# Altium PCB Optogentics_Controller.PcbDoc
Units mm, origin at the board's own origin, x right, y up, seen from the top; angles counter-clockwise.
Board outline 109.09 x 58.55 mm, 4 copper layers (Top Layer, Internal Plane 1, Signal Layer 1, Bottom Layer), stack 0.778 mm thick; 87 components, 64 nets, 287 pads, 52 vias.
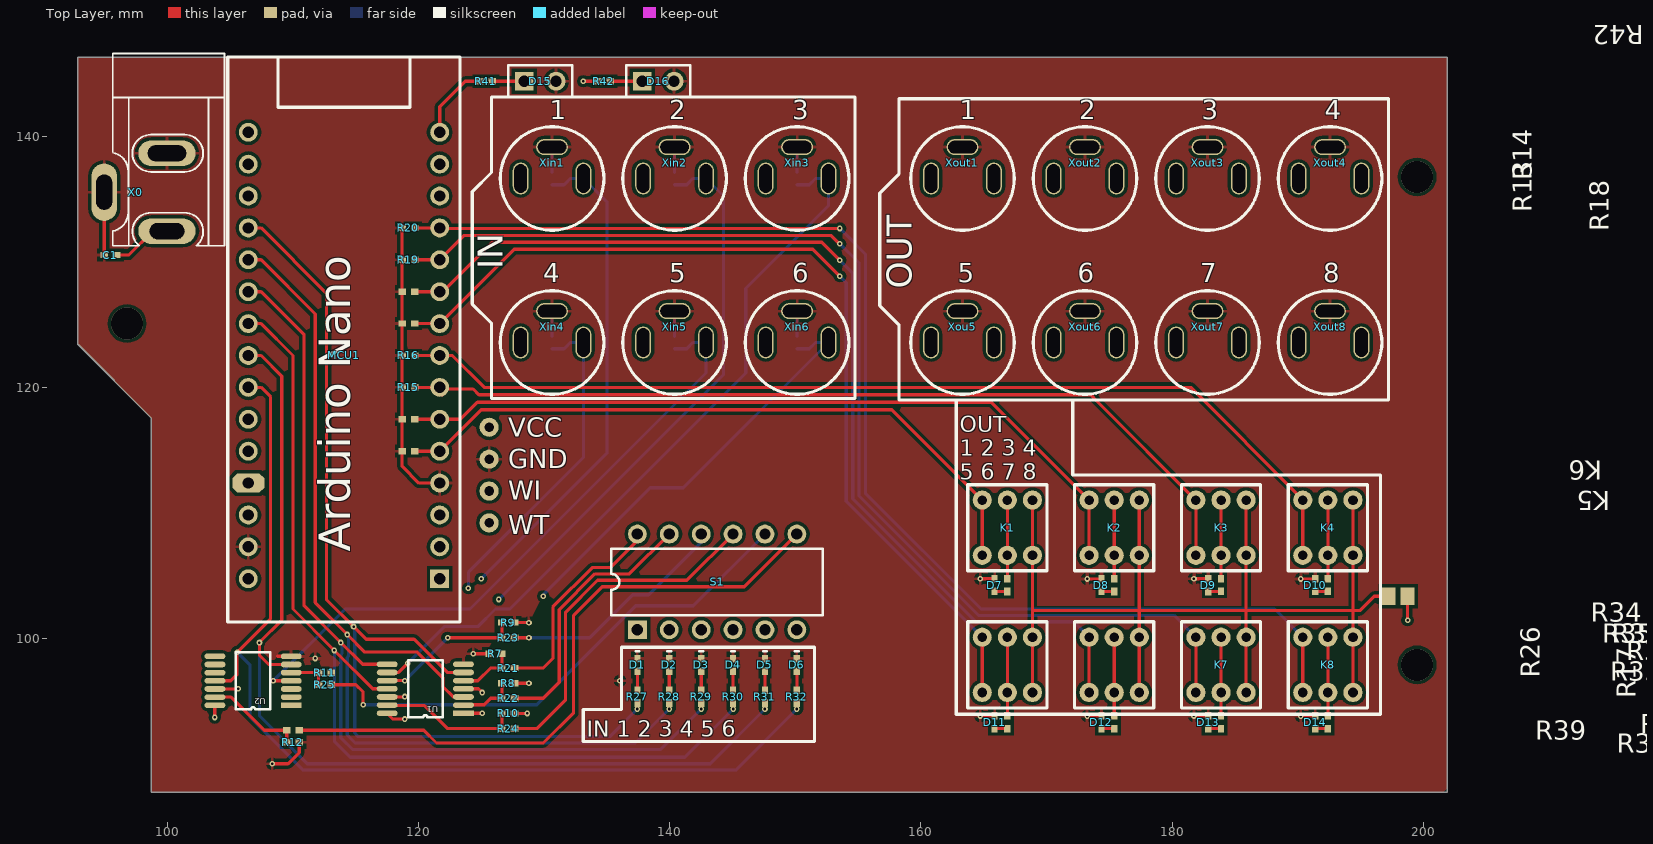
[diagram p0: Top Layer view]
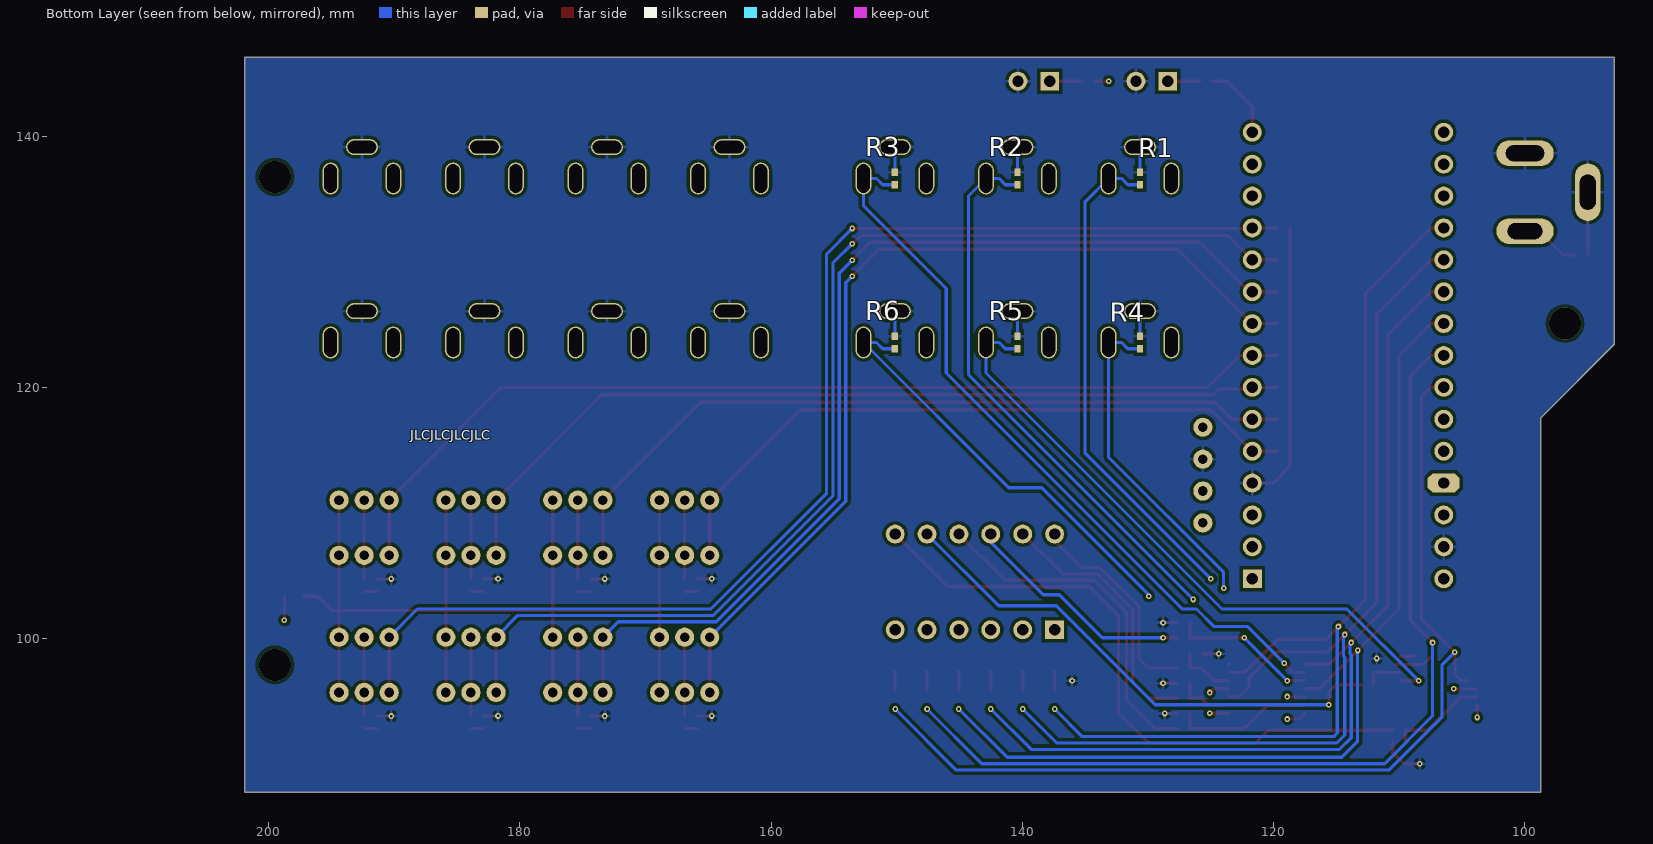
[diagram p1: Bottom Layer view, seen from below]
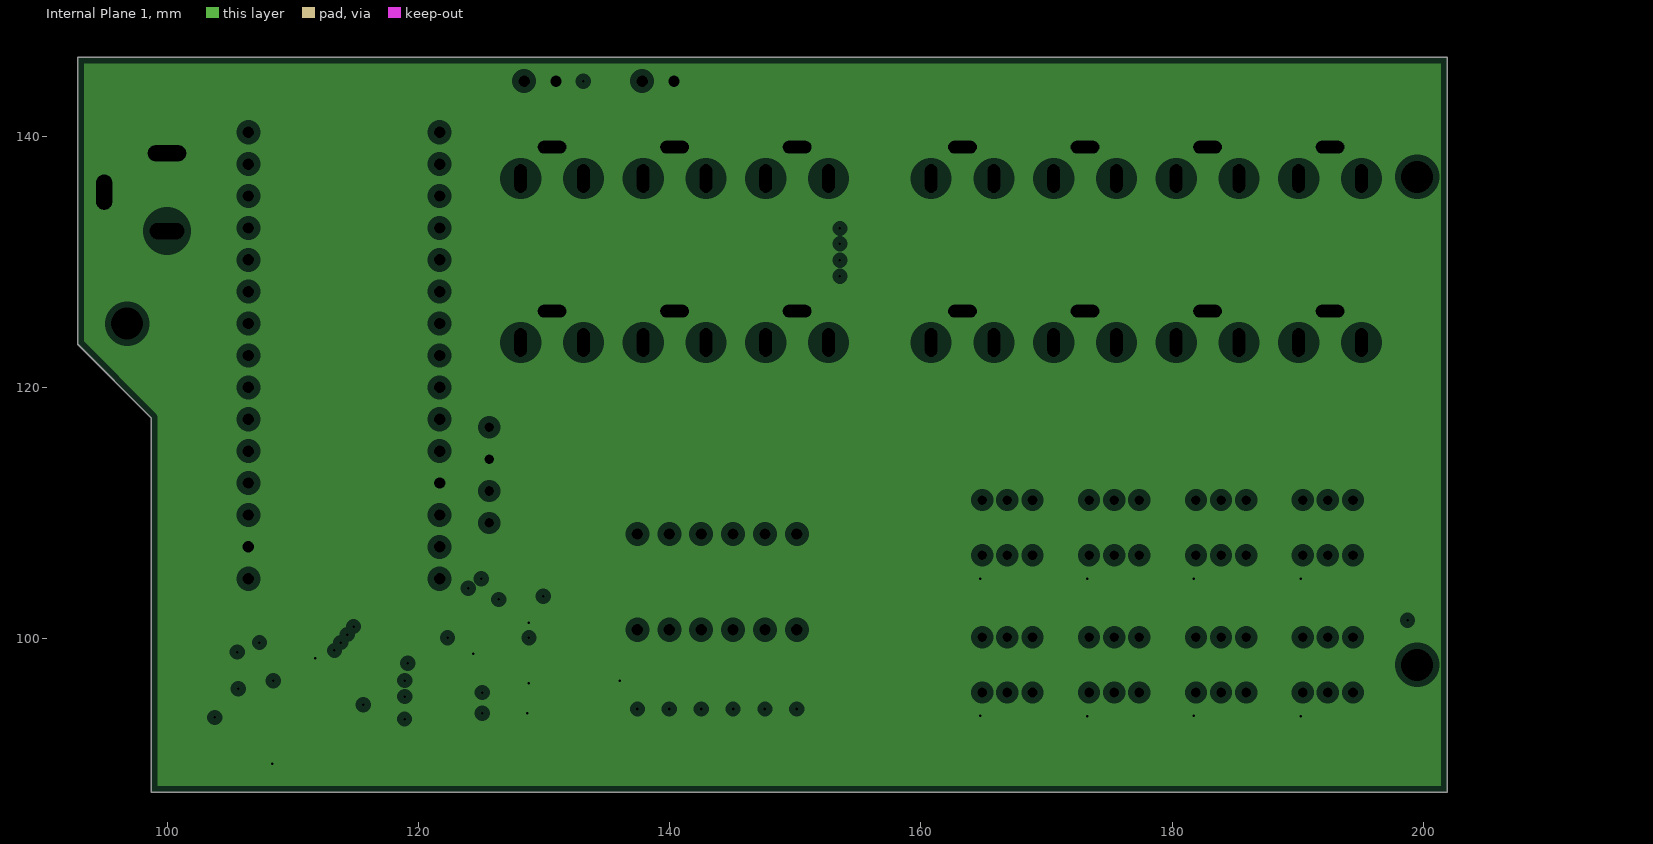
[diagram p2: Internal Plane 1, clearances drawn from the general rule]
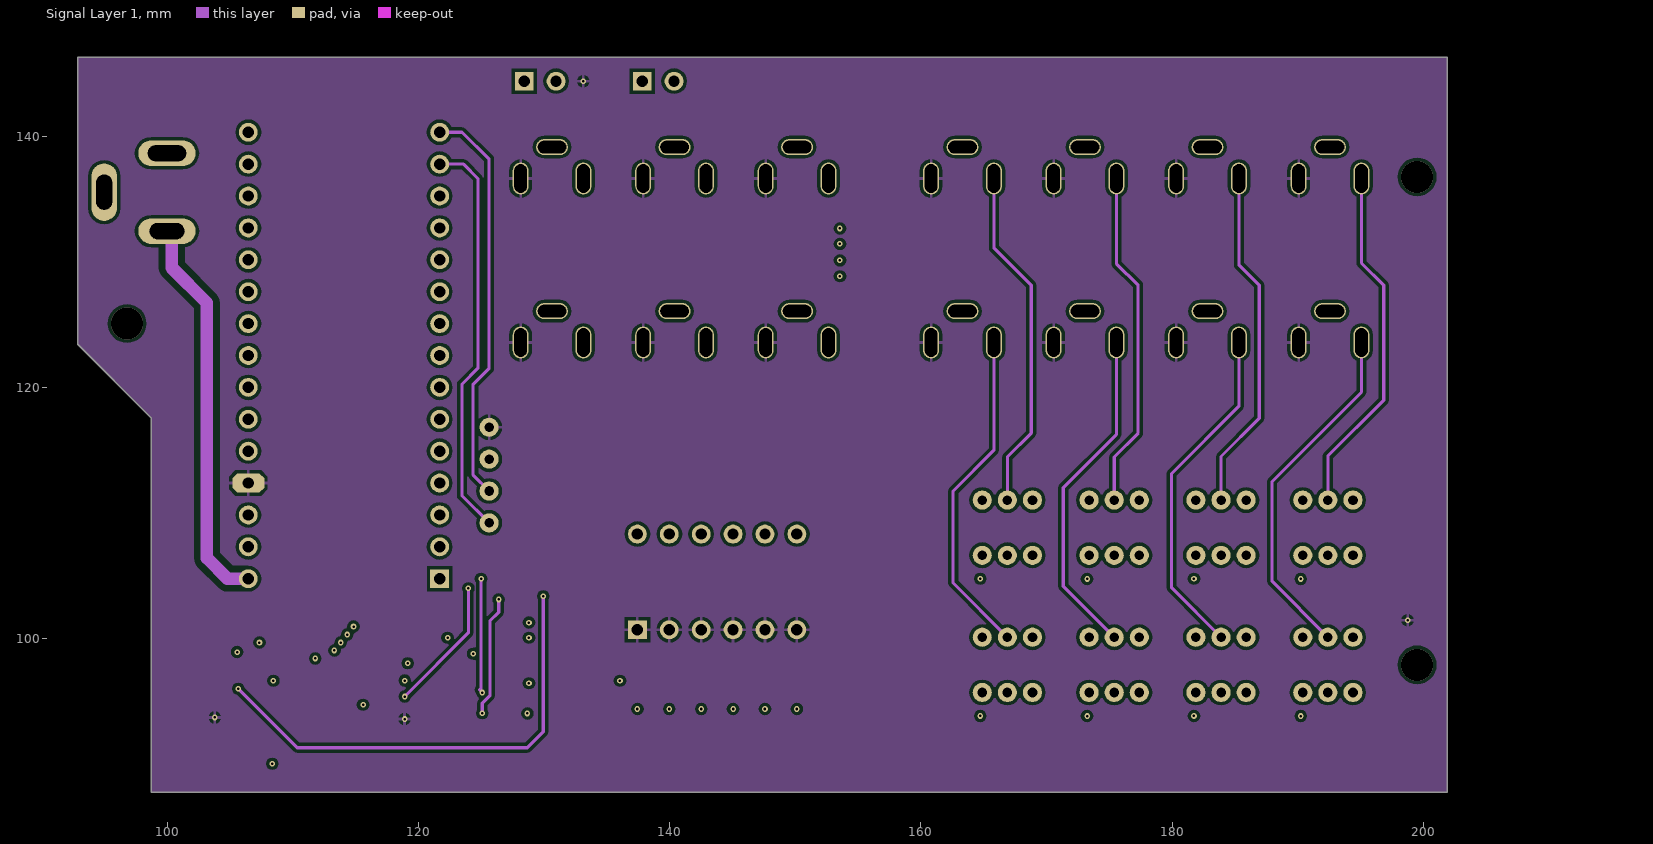
[diagram p3: Signal Layer 1]

## Layer stack, top to bottom
Top Solder: solder mask 0.0102, Solder Resist, Dk 3.5
Top Layer: signal copper 0.0356
Dielectric 1: core 0.254, FR-4, Dk 4.2
Internal Plane 1: plane copper 0.036, net GND
Dielectric 3: prepreg 0.127, Dk 4.2
Signal Layer 1: signal copper 0.036
Dielectric 2: core 0.254, Dk 4.2
Bottom Layer: signal copper 0.0356
Bottom Solder: solder mask 0.0102, Solder Resist, Dk 3.5

## Board outline
98.679,117.602 92.837,123.444 92.837,146.304 201.93,146.304 201.93,87.757 98.679,87.757

## Design rules (kind name [scope] priority, off if disabled: settings)
Clearance Clearance_1 [All] p1: gap=0.254 ignorepadtopadclearanceinfootprint=FALSE except(0: Arc-Hole Track-Hole SMDPad-Hole THPad-Hole Via-Hole Fill-Hole Poly-Hole Region-Hole Text-Hole; 0.064: SMDPad-SMDPad)
PlaneClearance [All] p1: clearance=0.508
PlaneConnect [All] p1: planeconnectstyle=Relief reliefexpansion=0.508 reliefentries=4 reliefconductorwidth=0.254 reliefairgap=0.254
PolygonConnect [All] p1: connectstyle=Relief reliefconductorwidth=0.254 reliefentries=4 polygonreliefangle="90 Angle" airgapwidth=0.254
RoutingVias [All] p1: holewidth=0.711 width=1.27 viastyle="Through Hole" minholewidth=0.711 minwidth=1.27 maxholewidth=0.711 maxwidth=1.27
SolderMaskExpansion [All] p1: expansion=0.102
Width [All] p1: maxlimit=1.5 minlimit=0.254 preferedwidth=0.254 toplayer_maxwidth=1.173 bottomlayer_maxwidth=1.173 minimp=50.000000 maximp=50.000000 favimp=50.000000
28 further rules are at their usual default settings.

## Components (designator, comment, footprint, x,y, rotation, side; value= is the part's Value field where it differs from the comment)
C1 "Cap Semi" 0402 95.449,130.556 r180 top value=2.2uF
D1 "LED2" 0402-A 137.414,97.917 r270 top
D2 "LED2" 0402-A 139.954,97.917 r270 top
D3 "LED2" 0402-A 142.494,97.917 r270 top
D4 "LED2" 0402-A 145.034,97.917 r270 top
D5 "LED2" 0402-A 147.574,97.917 r270 top
D6 "LED2" 0402-A 150.114,97.917 r270 top
D7 "LED2" 0402-A 165.862,104.267 r270 top
D8 "LED2" 0402-A 174.371,104.267 r270 top
D9 "LED2" 0402-A 182.88,104.259 r270 top
D10 "LED2" 0402-A 191.389,104.267 r270 top
D11 "LED2" 0402-A 165.862,93.345 r270 top
D12 "LED2" 0402-A 174.371,93.345 r270 top
D13 "LED2" 0402-A 182.88,93.345 r270 top
D14 "LED2" 0402-A 191.389,93.345 r270 top
D15 "LED2" HDR1X2 128.397,144.399 r0 top
D16 "LED2" HDR1X2 137.795,144.399 r0 top
K1 "SW_PB" SW_PB#1 166.878,108.839 r90 top
K2 "SW_PB" SW_PB#2 175.387,108.839 r90 top
K3 "SW_PB" SW_PB#2 183.896,108.839 r90 top
K4 "SW_PB" SW_PB#3 192.405,108.839 r90 top
K5 "SW_PB" SW_PB#2 166.878,97.917 r90 top
K6 "SW_PB" SW_PB#2 175.387,97.917 r90 top
K7 "SW_PB" SW_PB#2 183.896,97.917 r90 top
K8 "SW_PB" SW_PB#2 192.405,97.917 r90 top
MCU1 "Arduino Nano" "Arduino Nano" 114.046,122.555 r180 top
R1 "Res3" 0402 130.618,136.652 r90 bottom value=10K
R2 "Res3" 0402 140.376,136.652 r90 bottom value=10K
R3 "Res3" 0402 150.134,136.652 r90 bottom value=10K
R4 "Res3" 0402 130.618,123.587 r90 bottom value=10K
R5 "Res3" 0402 140.376,123.587 r90 bottom value=10K
R6 "Res3" 0402 150.134,123.587 r90 bottom value=10K
R7 "Res3" 0402 126.111,98.806 r180 top value=10K
R8 "Res3" 0402 127.127,96.456 r0 top value=10K
R9 "Res3" 0402 127.127,101.282 r0 top value=10K
R10 "Res3" 0402 127.127,94.043 r0 top value=10K
R11 "Res3" 0402 112.522,97.282 r0 top value=10K
R12 "Res3" 0402 109.982,91.758 r0 top value=10K
R13 "Res3" 0402 119.177,114.935 r180 top value=10K
R14 "Res3" 0402 119.169,117.475 r180 top value=10K
R15 "Res3" 0402 119.169,120.015 r180 top value=10K
R16 "Res3" 0402 119.177,122.555 r180 top value=10K
R17 "Res3" 0402 119.169,125.095 r180 top value=10K
R18 "Res3" 0402 119.169,127.635 r180 top value=10K
R19 "Res3" 0402 119.169,130.175 r180 top value=10K
R20 "Res3" 0402 119.169,132.715 r180 top value=10K
R21 "Res3" 0402 127.127,97.663 r180 top value=2K
R22 "Res3" 0402 127.127,95.25 r180 top value=2K
R23 "Res3" 0402 127.127,100.076 r180 top value=2K
R24 "Res3" 0402 127.127,92.837 r180 top value=2K
R25 "Res3" 0402 112.522,96.33 r180 top value=2K
R26 "Res3" 0402 109.982,92.71 r180 top value=2K
R27 "Res3" 0402 137.414,95.377 r90 top value=820
R28 "Res3" 0402 139.954,95.377 r90 top value=820
R29 "Res3" 0402 142.494,95.377 r90 top value=820
R30 "Res3" 0402 145.034,95.377 r90 top value=820
R31 "Res3" 0402 147.574,95.377 r90 top value=820
R32 "Res3" 0402 150.114,95.377 r90 top value=820
R33 "Res3" 0402 166.878,104.259 r270 top value=820
R34 "Res3" 0402 175.387,104.259 r270 top value=820
R35 "Res3" 0402 183.896,104.267 r270 top value=820
R36 "Res3" 0402 192.405,104.267 r270 top value=820
R37 "Res3" 0402 166.878,93.345 r270 top value=820
R38 "Res3" 0402 175.387,93.345 r270 top value=820
R39 "Res3" 0402 183.896,93.345 r270 top value=820
R40 "Res3" 0402 192.405,93.345 r270 top value=820
R41 "Res3" 0402 125.349,144.399 r0 top value=820
R42 "Res3" 0402 134.747,144.399 r0 top value=820
R42 "Res3" C0805 197.993,103.378 r180 top value=10 (schematic designator R27)
S1 "SW DIP-6" DIP-12/SW 143.764,104.521 r0 top (schematic designator S?)
U1 "Component_1" MM74HC86 120.523,96.012 r180 top
U2 "Component_1" MM74HC86 106.807,96.647 r180 top
X0 "Source" PWR 99.949,138.661 r90 top
Xin1 "RJ-392" Connectors 130.618,136.652 r0 top
Xin2 "RJ-392" Connectors 140.376,136.652 r0 top
Xin3 "RJ-392" Connectors 150.134,136.652 r0 top
Xin4 "RJ-392" Connectors 130.618,123.587 r0 top
Xin5 "RJ-392" Connectors 140.376,123.587 r0 top
Xin6 "RJ-392" Connectors 150.134,123.587 r0 top
Xou5 "RJ-392" Connectors 163.305,123.587 r0 top
Xout1 "RJ-392" Connectors 163.305,136.652 r0 top
Xout2 "RJ-392" Connectors 173.063,136.652 r0 top
Xout3 "RJ-392" Connectors 182.821,136.652 r0 top
Xout4 "RJ-392" Connectors 192.579,136.652 r0 top
Xout6 "RJ-392" Connectors 173.063,123.587 r0 top
Xout7 "RJ-392" Connectors 182.821,123.587 r0 top
Xout8 "RJ-392" Connectors 192.579,123.587 r0 top

## Footprints (in the part's own frame and the unit in brackets; to place one, negate y for a bottom-side part, rotate by r counter-clockwise, add the part's x,y. Pads: shape width x height; smd on the part's side, far side on the other; paste and mask are expansions set on the pad)
0402 [mm] "Chip Capacitor, Body 1.0x0.5mm, IPC High Density"
  rect 0.6x0.5 smd: 1(-0.5,0) 2(0.5,0)
  body extent -0.55,-0.3 0.55,0.3, height 1.3
0402-A [mm] "Chip Inductor, Body 1.0x0.5mm, IPC High Density"
  rect 0.6x0.5 smd: 1(-0.5,0) 2(0.5,0)
  silkscreen extent -1.1,-0.15 -1.1,0.15, body extent -0.55,-0.3 0.55,0.3, height 0.55
"Arduino Nano" [mm]
  rect 1.5x1.5 hole 0.9: 1(-7.62,17.78)
  round 1.5 hole 0.9: 2(-7.62,15.24) 3(-7.62,12.7) 4(-7.62,10.16) 5(-7.62,7.62) 6(-7.62,5.08) 7(-7.62,2.54) 8(-7.62,0) 9(-7.62,-2.54) 10(-7.62,-5.08) 11(-7.62,-7.62) 12(-7.62,-10.16) 13(-7.62,-12.7) 14(-7.62,-15.24) 15(-7.62,-17.78) 16(7.62,-17.78) 17(7.62,-15.24) 18(7.62,-12.7) 19(7.62,-10.16) 20(7.62,-7.62) 21(7.62,-5.08) 22(7.62,-2.54) 23(7.62,0) 24(7.62,2.54) 25(7.62,5.08) 26(7.62,7.62) 28(7.62,12.7) 29(7.62,15.24) 30(7.62,17.78)
  oct 2.54x1.5 hole 0.9 mask+0.102: 27(7.62,10.16)
  silkscreen extent -9.25,-23.77 9.25,21.23
C0805 [mm] "Chip Capacitor, Body 2.0x1.3mm, IPC High Density"
  rect 1.1x1.4 smd: 1(-0.75,0) 2(0.75,0)
  body extent -1.1,-0.72 1.1,0.72, height 1.4
Connectors [mm]
  oval 2.54x1.27 hole 1 slot 2.27 at 0 deg: 1(0,2.5)
  oval 1.27x2.54 hole 1 slot 2.27 at 90 deg: 2(-2.5,0) 3(2.5,0)
  silkscreen extent -4.13,-4.12 4.13,4.12
DIP-12/SW [mm] "DIP Switch; 12 Leads"
  rect 1.5x1.5 hole 0.9: 1(-6.35,-3.81)
  round 1.5 hole 0.9: 2(-3.81,-3.81) 3(-1.27,-3.81) 4(1.27,-3.81) 5(3.81,-3.81) 6(6.35,-3.81) 7(6.35,3.81) 8(3.81,3.81) 9(1.27,3.81) 10(-1.27,3.81) 11(-3.81,3.81) 12(-6.35,3.81)
  silkscreen extent -8.43,-2.65 8.41,2.65
HDR1X2 [mm] "Connector; Header; 2 Position"
  rect 1.5x1.5 hole 0.9: 1(0,0)
  round 1.5 hole 0.9: 2(2.54,0)
  silkscreen extent -1.27,-1.27 3.81,1.27
MM74HC86 [mm]
  rect 1.66x0.45 smd mask+0.05: 1(-3.037,1.95)
  oval 1.66x0.45 smd mask+0.05: 2(-3.037,1.3) 3(-3.037,0.65) 4(-3.037,0) 5(-3.037,-0.65) 6(-3.037,-1.3) 7(-3.037,-1.95) 8(3.037,-1.95) 9(3.037,-1.3) 10(3.037,-0.65) 11(3.037,0) 12(3.037,0.65) 13(3.037,1.3) 14(3.037,1.95)
  silkscreen extent -1.37,-2.28 1.37,2.28
PWR [mil]
  oval 80x180 hole 50 slot 110 at 90 deg: 1(-244.09,0)
  oval 80x180 hole 50 slot 120 at 90 deg: 2(0,0)
  oval 180x80 hole 50 slot 110 at 0 deg: 3(-122.05,196.85)
  Top Layer lines w12: 3.8,-7.5 1.3,-10
  silkscreen extent -290,-180 313,170
SW_PB#1 [mil]
  round 60 hole 30: 1(-86.61,-78.74) 1(86.61,-78.74) 2(-86.61,0) 2(86.61,0) 3(-86.61,78.74) 3(86.61,78.74)
  Top Layer lines w10: -86.61,78.74 86.61,78.74 ; -86.61,0 -80,0 86.61,0 ; -86.61,-78.74 86.61,-78.74
  silkscreen extent -135,-124 135,124
SW_PB#2 [mil]
  round 60 hole 30: 1(-86.61,-78.74) 1(86.61,-78.74) 2(-86.61,0) 2(86.61,0) 3(-86.61,78.74) 3(86.61,78.74)
  Top Layer lines w10: -86.61,78.74 86.61,78.74 ; -86.61,0 86.61,0 ; -86.61,-78.74 86.61,-78.74
  silkscreen extent -135,-124 135,124
SW_PB#3 [mil]
  round 60 hole 30: 1(-86.61,-78.74) 1(86.61,-78.74) 2(-86.61,0) 2(86.61,0) 3(-86.61,78.74) 3(86.61,78.74)
  Top Layer lines w10: -86.61,78.74 75,78.74 86.61,78.74 ; -86.61,0 86.61,0 ; -86.61,-78.74 86.61,-78.74
  silkscreen extent -135,-124 135,124

## Part data
C1: "Capacitor (Semiconductor SIM Model)", LatestRevisionDate=29-May-2009, LatestRevisionNote="IPC-7351 Footprint Added.", PackageDescription="Chip Capacitor", PackageReference=C1206, Published=8-Jun-2000, Publisher="Altium Limited"
D1 D2 D3 D4 D5 D6 D7 D8 D9 D10 D11 D12 D13 D14 D15 D16: "Typical RED, GREEN, YELLOW, AMBER GaAs LED", LatestRevisionDate=17-Jul-2002, LatestRevisionNote="Re-released for DXP Platform.", PackageDescription="SM LED; 2 Flat Leads", PackageReference=3.2X1.6X1.1, PackageVersion=Feb-2002, Published=8-Jun-2000, Publisher="Altium Limited"
R1 R2 R3 R4 R5 R6 R7 R8 R9 R10 R11 R12 R13 R14 R15 R16 R17 R18 R19 R20 R21 R22 R23 R24 R25 R26 R27 R28 R29 R30 R31 R32 R33 R34 R35 R36 R37 R38 R39 R40 R41 R42 R42: "Resistor", LatestRevisionDate=29-May-2009, LatestRevisionNote="IPC-7351 Footprint Added.", PackageDescription="Chip Resistor", PackageReference=J1-0603, Published=8-Jun-2000, Publisher="Altium Limited"
S1: "DIP Switch, 6 Position, SPST", LatestRevisionDate=17-Jul-2002, LatestRevisionNote="Re-released for DXP Platform.", PackageDescription="DIP Switch; 12 Leads", PackageReference=DIP-12/SW, Published=24-Mar-1999, Publisher="Altium Limited"

## Free pads (board coordinates)
  round 1.524 hole 0.762: 2(125.603,109.22) 2(125.603,111.76) 2(125.603,114.3) 2(125.603,116.84)

## Via types
v1: diameter 0.45, hole 0.2, Top Layer to Bottom Layer, 49 vias
v2: diameter 2.54, hole 2.54, Top Layer to Bottom Layer, 3 vias

## Nets (pads, with @x,y where several pads share a name; then routed paths per layer and width w, separated by ;. In a path a pad name is that pad's centre, name@x,y a point inside that pad or via, vN(x,y) a via of type N, cw(c..) or ccw(c..) an arc to the next point about the centre after c; other vN are vias at no path point)
CTR1: R7.1 R21.2 U1.5 | length 4.7
  Top Layer w0.254: U1.5 123.576,96.647 124.714,96.647 125.73,97.663 R21.2@126.619,97.663 ; R21.2 R7.1@126.627,98.869
CTR2: R8.1 R22.2 U1.2 | length 4.5
  Top Layer w0.254: U1.2 123.59,94.742 125.222,94.742 125.73,95.25 R22.2 R8.1
CTR3: R9.1 R23.2 U1.10 | length 11.7
  Top Layer w0.254: U1.10@117.511,96.662 v1(118.883,96.662) ; v1(122.296,100.076) R23.2@126.619,100.076 ; R23.2 R9.1
  Bottom Layer w0.254: v1(118.883,96.662) v1(122.296,100.076)
CTR4: R10.1 R24.2 U1.13 | length 11.1
  Top Layer w0.254: U1.13 117.53,94.668 120.47,94.668 122.301,92.837 R24.2 R10.1
CTR5: R11.1 R25.2 U2.5 | length 3.1
  Top Layer w0.254: U2.5 112.022,97.297 R25.2
CTR6: R12.1 R26.2 U2.13 | length 7.8
  Top Layer w0.254: U2.13 105.059,95.347 107.696,92.71 R26.2 R12.1
GND: C1.2 D1.1 D2.1 D3.1 D4.1 D5.1 D6.1 D7.1 D8.1 D9.1 D10.1 D11.1 D12.1 D13.1 D14.1 D15.2 D16.2 MCU1.4 MCU1.29 pad.2@125.603,114.3 R1.2 R2.2 R3.2 R4.2 R5.2 R6.2 R7.2 R8.2 R9.2 R10.2 R11.2 R12.2 R13.2 R14.2 R15.2 R16.2 R17.2 R18.2 R19.2 R20.2 U1.7 U2.7 X0.2 X0.3 Xin1.1 Xin2.1 Xin3.1 Xin4.1 Xin5.1 Xin6.1 Xou5.1 Xout1.1 Xout2.1 Xout3.1 Xout4.1 Xout6.1 Xout7.1 Xout8.1 | length 57.8
  Top Layer w0.254: C1.2@94.949,130.556 X0.3 ; v1(108.331,90.035) 109.593,90.035 110.482,90.924 R12.2 ; 108.751,98.597 U2.7 ; R20.2 118.669,114.943 R13.2 118.677,113.733 120.015,112.395 MCU1.4 ; U1.7 U1.7@123.56,98.033 ; v1(124.333,98.806) R7.2 ; R10.2 v1(128.651,94.043) ; R8.2 v1(128.778,96.456) ; R9.2 v1(128.778,101.282) ; v1(164.719,93.845) D11.1 ; v1(164.719,104.767) D7.1 ; v1(173.228,93.837) D12.1@174.371,93.837 ; v1(173.228,104.759) D8.1@174.371,104.759 ; v1(181.737,93.845) D13.1 ; v1(181.737,104.767) D9.1@182.88,104.767 ; v1(190.246,93.837) D14.1@191.389,93.837 ; v1(190.246,104.759) D10.1@191.389,104.759
  Bottom Layer w0.254: R4.2 Xin4.1 ; R1.2 Xin1.1 ; R5.2 Xin5.1 ; R2.2 Xin2.1 ; R6.2 Xin6.1 ; R3.2 Xin3.1
  other v1: 136.025,96.647 111.76,98.425
IN1: MCU1.19 R27.1 U1.6 | length 78.1
  Top Layer w0.254: MCU1.19 107.442,132.715 112.649,127.508 112.649,103.124 v1(114.808,100.965) 115.824,99.949 119.634,99.949 122.271,97.312 U1.6
  Bottom Layer w0.254: v1(114.808,100.965) 114.906,100.867 114.906,92.485 115.189,92.202 135.216,92.202 v1(137.414,94.4)
IN1_0: R1.1 U1.4 Xin1.3 | length 50.3
  Top Layer w0.254: U1.4 124.758,96.012 v1(125.057,95.713)
  Signal Layer 1 w0.254: v1(124.968,104.775) 124.968,96.056 124.841,95.929 v1(125.057,95.713)
  Bottom Layer w0.254: v1(124.968,104.775) 135.001,114.808 135.001,134.769 Xin1.3 132.08,136.652 131.58,136.152 R1.1
IN2: MCU1.20 R28.1 U1.3 | length 80.6
  Top Layer w0.254: MCU1.20 107.442,130.175 111.76,125.857 111.76,102.87 v1(114.3,100.33) 115.697,98.933 119.888,98.933 121.92,96.901 121.92,96.19 122.748,95.362 U1.3
  Bottom Layer w0.254: v1(114.3,100.33) 114.398,100.232 114.398,98.599 114.3,98.501 114.3,92.329 114.935,91.694 137.248,91.694 v1(139.954,94.4)
IN2_0: R2.1 U1.1 Xin2.3 | length 55.3
  Top Layer w0.254: U1.1 v1(125.057,94.062)
  Signal Layer 1 w0.254: v1(125.057,94.062) 125.057,94.856 125.663,95.462 125.663,101.406 126.365,102.108 v1(126.365,103.124)
  Bottom Layer w0.254: v1(126.365,103.124) 144.272,121.031 144.272,135.256 Xin2.3 141.838,136.652 141.338,136.152 R2.1
IN3: MCU1.21 R29.1 U1.8 | length 74.1
  Top Layer w0.254: MCU1.21 107.442,127.635 110.871,124.206 110.871,102.616 v1(113.792,99.695) 115.525,97.962 U1.8
  Bottom Layer w0.254: v1(113.792,99.695) 113.89,99.597 113.89,98.809 113.792,98.711 113.792,92.119 114.725,91.186 139.28,91.186 v1(142.494,94.4)
IN3_0: R3.1 U1.9 Xin3.3 | length 59.4
  Top Layer w0.254: U1.9 118.394,97.312 v1(119.126,98.044)
  Bottom Layer w0.254: v1(119.126,98.044) 122.047,100.965 124.714,100.965 126.111,102.362 127.254,102.362 146.05,121.158 146.05,127.889 152.634,134.473 Xin3.3 151.596,136.652 151.096,136.152 R3.1
IN4: MCU1.22 R30.1 U1.11 | length 76
  Top Layer w0.254: MCU1.22 107.442,125.095 109.982,122.555 109.982,102.362 v1(113.284,99.06) 116.332,96.012 U1.11
  Bottom Layer w0.254: v1(113.284,99.06) 113.284,91.821 114.554,90.551 141.185,90.551 v1(145.034,94.4)
IN4_0: R4.1 U1.12 Xin4.3 | length 38.2
  Top Layer w0.254: U1.12 118.852,95.362 v1(118.883,95.392)
  Signal Layer 1 w0.254: v1(118.883,95.392) 123.952,100.462 v1(123.952,104.013)
  Bottom Layer w0.254: v1(123.952,104.013) 123.952,105.283 133.118,114.449 Xin4.3 132.08,123.587 131.58,123.087 R4.1
IN5: MCU1.23 R31.1 U2.6 | length 79
  Top Layer w0.254: MCU1.23 107.442,122.555 109.093,120.904 109.093,101.48 107.315,99.702 v1(107.315,99.695) 107.315,98.679 108.047,97.947 U2.6 U2.6@110.225,97.947
  Bottom Layer w0.254: v1(107.315,99.695) 107.315,93.853 111.125,90.043 143.217,90.043 v1(147.574,94.4)
IN5_0: R5.1 U2.4 Xin5.3 | length 51.2
  Top Layer w0.254: v1(108.42,96.647) U2.4
  Bottom Layer w0.254: v1(108.42,96.647) 114.135,102.362 124.079,102.362 142.876,121.159 Xin5.3 141.838,123.587 141.338,123.087 R5.1
IN6: MCU1.24 R32.1 U2.11 | length 79.4
  Top Layer w0.254: U2.11@104.532,96.647 105.029,96.647 105.537,97.155 v1(105.537,98.933) 108.204,101.6 108.204,119.253 107.442,120.015 MCU1.24
  Bottom Layer w0.254: v1(105.537,98.933) 106.553,97.917 106.553,93.789 110.807,89.535 145.249,89.535 v1(150.114,94.4)
IN6_0: R6.1 U2.12 Xin6.3 | length 73.3
  Top Layer w0.254: U2.12 105.611,95.997 v1(105.626,96.012)
  Signal Layer 1 w0.254: v1(105.626,96.012) 110.325,91.313 128.651,91.313 129.921,92.583 v1(129.921,103.378)
  Bottom Layer w0.254: v1(129.921,103.378) 129.921,103.505 138.43,112.014 141.061,112.014 Xin6.3 151.596,123.587 151.096,123.087 R6.1
NetD1_1: D1.2 R27.2 | length 1.5
  Top Layer w0.254: R27.2 D1.2
NetD2_1: D2.2 R28.2 | length 1.5
  Top Layer w0.254: R28.2 D2.2
NetD3_1: D3.2 R29.2 | length 1.5
  Top Layer w0.254: R29.2 D3.2
NetD4_1: D4.2 R30.2 | length 1.5
  Top Layer w0.254: R30.2 D4.2
NetD5_1: D5.2 R31.2 | length 1.5
  Top Layer w0.254: R31.2 D5.2
NetD6_1: D6.2 R32.2 | length 1.5
  Top Layer w0.254: R32.2 D6.2
NetD7_1: D7.2 R33.2 | length 1
  Top Layer w0.254: D7.2 166.87,103.767 R33.2
NetD8_1: D8.2 R34.2 | length 1
  Top Layer w0.254: D8.2 175.379,103.767 R34.2
NetD9_1: D9.2 R35.2 | length 1
  Top Layer w0.254: D9.2 183.888,103.759 R35.2
NetD10_1: D10.2 R36.2 | length 1
  Top Layer w0.254: D10.2 R36.2
NetD11_1: D11.2 R37.2 | length 1
  Top Layer w0.254: D11.2 R37.2
NetD12_1: D12.2 R38.2 | length 1
  Top Layer w0.254: D12.2 R38.2
NetD13_1: D13.2 R39.2 | length 1
  Top Layer w0.254: D13.2 R39.2
NetD14_1: D14.2 R40.2 | length 1
  Top Layer w0.254: D14.2 R40.2
NetD15_1: D15.1 R41.2 | length 2.5
  Top Layer w0.254: R41.2 D15.1
NetD16_1: D16.1 R42.2@135.247,144.399 | length 2.5
  Top Layer w0.254: R42.2@135.247,144.399 D16.1
NetR21_1: R21.1 S1.12 | length 16.9
  Top Layer w0.254: R21.1@127.635,97.663 129.921,97.663 130.683,98.425 130.683,102.529 133.818,105.664 135.255,105.664 S1.12@137.795,108.204
NetR22_1: R22.1 S1.11 | length 21.1
  Top Layer w0.254: R22.1 129.921,95.25 131.191,96.52 131.191,102.318 134.029,105.156 136.779,105.156 S1.11
NetR23_1: R23.1 S1.10 | length 18.7
  Top Layer w0.254: R23.1 v1(128.778,100.076)
  Bottom Layer w0.254: v1(128.778,100.076) 133.604,100.076 137.033,103.505 138.303,103.505 142.494,107.696 S1.10
NetR24_1: R24.1 S1.9 | length 27.9
  Top Layer w0.254: R24.1 129.413,92.837 131.699,95.123 131.699,102.108 134.239,104.648 141.351,104.648 S1.9
NetR25_1: R25.1 S1.8 | length 41.4
  Top Layer w0.254: R25.1 114.998,96.33 115.57,95.758 v1(115.57,94.742)
  Bottom Layer w0.254: v1(115.57,94.742) 129.413,94.742 136.283,101.612 136.283,101.619 137.28,102.616 141.859,102.616 S1.8
NetR26_1: R26.1 S1.7 | length 51.5
  Top Layer w0.254: R26.1 120.396,92.71 121.412,91.694 129.921,91.694 132.334,94.107 132.334,101.854 134.62,104.14 145.923,104.14 S1.7
OUT1: K1.2 R33.1 Xout1.3 | length 29.7
  Top Layer w0.254: R33.1 166.878,106.639 K1.2@166.878,106.807
  Signal Layer 1 w0.254: Xout1.3 165.805,131.121 168.783,128.143 168.783,116.373 166.878,114.468 K1.2@166.878,111.039
OUT1_0: K1.3 MCU1.5 R13.1 | length 49.6
  Top Layer w0.254: R13.1 MCU1.5 124.968,118.237 157.68,118.237 K1.3@164.878,111.039
OUT2: K2.2 R34.1 Xout2.3 | length 29
  Top Layer w0.254: R34.1 K2.2@175.387,106.639
  Signal Layer 1 w0.254: K2.2@175.387,111.039 175.387,114.468 177.292,116.373 177.292,128.143 175.563,129.872 Xout2.3
OUT2_0: K2.3 MCU1.6 R14.1 | length 57.5
  Top Layer w0.254: R14.1 MCU1.6 123.317,117.475 124.672,118.83 165.596,118.83 K2.3@173.387,111.039
OUT3: K3.2 R35.1 Xout3.3 | length 29.4
  Top Layer w0.254: R35.1 K3.2@183.896,106.639
  Signal Layer 1 w0.254: K3.2@183.896,111.08 183.896,114.509 186.944,117.557 186.944,128.143 185.321,129.766 Xout3.3
OUT3_0: K3.3 MCU1.7 R15.1 | length 66.9
  Top Layer w0.254: R15.1 MCU1.7 MCU1.7@121.666,119.888 ; MCU1.7@121.285,119.888 MCU1.7@121.666,119.888 ; MCU1.7@121.872,119.428 121.666,119.634 MCU1.7@121.666,119.888 ; 174.015,118.914 173.507,119.422 124.793,119.428 124.333,119.888 MCU1.7@121.666,119.888 ; 174.015,118.92 K3.3@181.896,111.039
OUT4: K4.2 R36.1 Xout4.3 | length 30
  Top Layer w0.254: R36.1 K4.2@192.405,106.639
  Signal Layer 1 w0.254: K4.2@192.405,111.121 192.405,114.55 196.85,118.995 196.85,128.143 195.079,129.914 Xout4.3
OUT4_0: K4.3 MCU1.8 R16.1 | length 75.6
  Top Layer w0.254: R16.1 MCU1.8 122.682,122.555 125.222,120.015 181.483,120.015 190.257,111.241 K4.3@190.257,110.892
OUT5: K5.2 R37.1 Xou5.3 | length 28.5
  Top Layer w0.254: R37.1 K5.2@166.878,95.717
  Signal Layer 1 w0.254: Xou5.3 165.805,115.005 162.56,111.76 162.56,104.435 K5.2@166.878,100.117
OUT5_0: K5.3 MCU1.9 R17.1 | length 70.7
  Top Layer w0.254: R17.1 MCU1.9 127.593,131.022 151.384,131.022 v1(153.543,128.863)
  Bottom Layer w0.254: v1(153.543,128.863) 154.051,128.355 154.051,110.944 K5.3@164.878,100.117
OUT6: K6.2 R38.1 Xout6.3 | length 28.8
  Top Layer w0.254: R38.1 K6.2@175.387,95.717
  Signal Layer 1 w0.254: K6.2@175.387,100.117 171.323,104.181 171.323,112.014 175.563,116.254 Xout6.3
OUT6_0: K6.3 MCU1.10 R18.1 | length 78.6
  Top Layer w0.254: R18.1 MCU1.10 ; MCU1.10@121.92,127.635 125.857,131.572 152.103,131.572 v1(153.543,130.133)
  Bottom Layer w0.254: v1(153.543,130.133) 154.559,129.117 154.559,111.154 164.367,101.346 172.158,101.346 K6.3@173.387,100.117
OUT7: K7.2 R39.1 Xout7.3 | length 29.2
  Top Layer w0.254: R39.1 K7.2@183.896,95.717
  Signal Layer 1 w0.254: K7.2@183.896,100.117 179.959,104.054 179.959,113.157 185.321,118.519 Xout7.3
OUT7_0: K7.3 MCU1.11 R19.1 | length 87.2
  Top Layer w0.254: R19.1 MCU1.11 123.613,132.122 152.823,132.122 v1@153.543,131.403
  Bottom Layer w0.254: v1(153.543,131.445) 155.067,129.921 155.067,111.365 164.578,101.854 180.159,101.854 K7.3@181.896,100.117
OUT8: K8.2 R40.1 Xout8.3 | length 30.1
  Top Layer w0.254: R40.1 K8.2@192.405,95.717
  Signal Layer 1 w0.254: K8.2@192.405,100.117 187.96,104.562 187.96,112.522 195.079,119.641 Xout8.3
OUT8_0: K8.3 MCU1.12 R20.1 | length 95.4
  Top Layer w0.254: R20.1 MCU1.12 121.708,132.673 v1(153.543,132.673)
  Bottom Layer w0.254: v1(153.543,132.673) 155.575,130.641 155.575,111.575 164.788,102.362 188.16,102.362 K8.3@190.405,100.117
VCC: C1.1 MCU1.30 X0.1 | length 35.9
  Top Layer w0.254: C1.1 96.901,130.556 98.806,132.461 X0.1
  Signal Layer 1 w1.016: X0.1@100.33,132.357 100.33,129.54 103.124,126.746 103.124,106.426 104.775,104.775 MCU1.30
VO_3.3: MCU1.17
VO_5: MCU1.27 pad.2@125.603,116.84 R42.1 S1.1 S1.2 S1.3 S1.4 S1.5 S1.6 U1.14 U2.14 Xin1.2 Xin2.2 Xin3.2 Xin4.2 Xin5.2 Xin6.2 Xou5.2 Xout1.2 Xout2.2 Xout3.2 Xout4.2 Xout6.2 Xout7.2 Xout8.2 | length 5.6
  Top Layer w0.254: v1(103.759,93.726) 103.759,94.686 U2.14 ; U1.14 117.948,93.599 v1(118.872,93.599) ; v1(133.104,144.391) R42.1@134.247,144.391 ; R42.1@198.751,103.378 198.755,103.374 v1(198.755,101.473)
VPin: K1.1 K2.1 K3.1 K4.1 K5.1 K6.1 K7.1 K8.1 R42.2@197.243,103.378 | length 54.9
  Top Layer w0.254: K5.1@168.878,100.117 168.878,102.235 ; K1.1@168.878,106.639 168.878,102.235 ; K6.1@177.387,100.117 177.387,102.235 ; K2.1@177.387,106.639 177.387,102.235 ; K7.1@185.896,100.117 185.896,102.235 ; K3.1@185.896,106.639 185.896,102.235 ; K8.1@194.405,100.117 194.405,102.235 ; K4.1@194.405,106.639 194.405,102.235 ; R42.2@197.243,103.378 196.088,103.378 194.945,102.235 194.405,102.235 ; 168.878,102.235 177.387,102.235 ; 177.387,102.235 185.896,102.235 ; 185.896,102.235 194.405,102.235
WI1: MCU1.15 pad.2@125.603,111.76 R41.1 | length 38.4
  Top Layer w0.254: MCU1.15 121.666,142.367 123.698,144.399 R41.1
  Signal Layer 1 w0.254: MCU1.15 123.444,140.335 125.603,138.176 125.603,121.539 124.333,120.269 124.333,113.03 pad.2@125.603,111.76
WI2: MCU1.16
WT: MCU1.14 pad.2@125.603,109.22 | length 32.4
  Signal Layer 1 w0.254: MCU1.14 123.571,137.795 124.714,136.652 124.714,121.539 123.444,120.269 123.444,111.379 pad.2@125.603,109.22
pads on no net: MCU1.1 MCU1.2 MCU1.3 MCU1.13 MCU1.18 MCU1.25 MCU1.26 MCU1.28 U2.1 U2.2 U2.3 U2.8 U2.9 U2.10
copper on no net:
  other v2: 199.517,97.917 96.774,125.095 199.517,136.779

## Polygon pours and split planes (outlines as drawn)
VO_5 on Signal Layer 1 "Internal_VCC5.0" (solid, remove dead copper, pour order 5): 98.679,117.602 92.837,123.444 92.837,146.304 201.93,146.304 201.93,87.757 98.679,87.757
GND on Bottom Layer "GND_L04_P007" (solid, remove dead copper, pour order 7): 98.679,117.602 92.837,123.444 92.837,146.304 201.93,146.304 201.93,87.757 98.679,87.757
GND on Top Layer "GND_L01_P008" (solid, remove dead copper, pour order 8): 98.679,117.602 92.837,123.444 92.837,146.304 201.93,146.304 201.93,87.757 98.679,87.757
GND on Internal Plane 1 (split plane): 201.42,88.267 99.189,88.267 99.189,117.602 99.18,117.702 99.151,117.797 99.103,117.886 99.04,117.963 93.347,123.655 93.347,145.794 201.42,145.794

## Other copper
Bottom Layer:
  pour cut-out: 215.392,106.299

## Silkscreen, mask and mechanical layers (free items; w line width, h text height)
Top Overlay:
  lines w0.254: 162.814,118.999 162.814,93.98 196.596,93.98 196.596,113.03 172.085,113.03 172.085,116.84 172.085,118.999 ; 162.815,118.999 172.086,118.999 ; 124.268,126.651 125.792,125.127 125.792,119.126 154.748,119.126 154.748,143.129 125.792,143.129 125.792,137.128 124.268,135.604 124.268,126.651 ; 133.096,91.821 151.511,91.821 151.511,99.314 136.144,99.314 136.144,94.361 133.096,94.361 133.096,91.821 ; 156.718,126.524 158.242,125 158.242,118.999 197.231,118.999 197.231,143.002 158.242,143.002 158.242,137.001 156.718,135.477 156.718,126.524
  text "1" at 130.429,141.351 h1.52
  text "2" at 139.954,141.351 h1.52
  text "3" at 149.733,141.351 h1.52
  text "1" at 163.068,141.351 h1.52
  text "2" at 172.593,141.351 h1.52
  text "3" at 182.372,141.351 h1.52
  text "4" at 192.151,141.351 h1.52
  text "IN" at 126.681,129.413 h2 r90
  text "4" at 129.921,128.397 h1.52
  text "5" at 139.954,128.397 h1.52
  text "6" at 149.733,128.397 h1.52
  text "5" at 162.941,128.397 h1.52
  text "6" at 172.466,128.397 h1.52
  text "7" at 182.245,128.397 h1.52
  text "8" at 192.024,128.397 h1.52
  text "OUT" at 159.258,127.889 h2 r90
  text "VCC" at 127.127,116.078 h1.52
  text "GND" at 127.127,113.58 h1.52
  text "OUT / 1 2 3 4 / 5 6 7 8" at 163.068,112.649 h1.27
  text "WI" at 127.127,111.083 h1.52
  text "WT" at 127.127,108.331 h1.52
  text "Arduino Nano" at 114.554,106.934 h2.54 r90
  text "IN 1 2 3 4 5 6" at 133.38,92.202 h1.27
  text "A0" at 259.08,72.136 h1.27
Bottom Overlay:
  text "JLCJLCJLCJLC" at 188.722,115.824 h0.76
Top Solder:
  text "Desingned by CIBR Instrumentation Core" at 161.417,90.17 h1
Mechanical 1:
  the board outline again, w0.254